# Altium PCB SwitchHub.PcbDoc
Units mm, origin at the board's own origin, x right, y up, seen from the top; angles counter-clockwise.
Board outline 50 x 50 mm, 2 copper layers (Top Layer, Bottom Layer); 42 components, 25 nets, 144 pads, 415 vias.
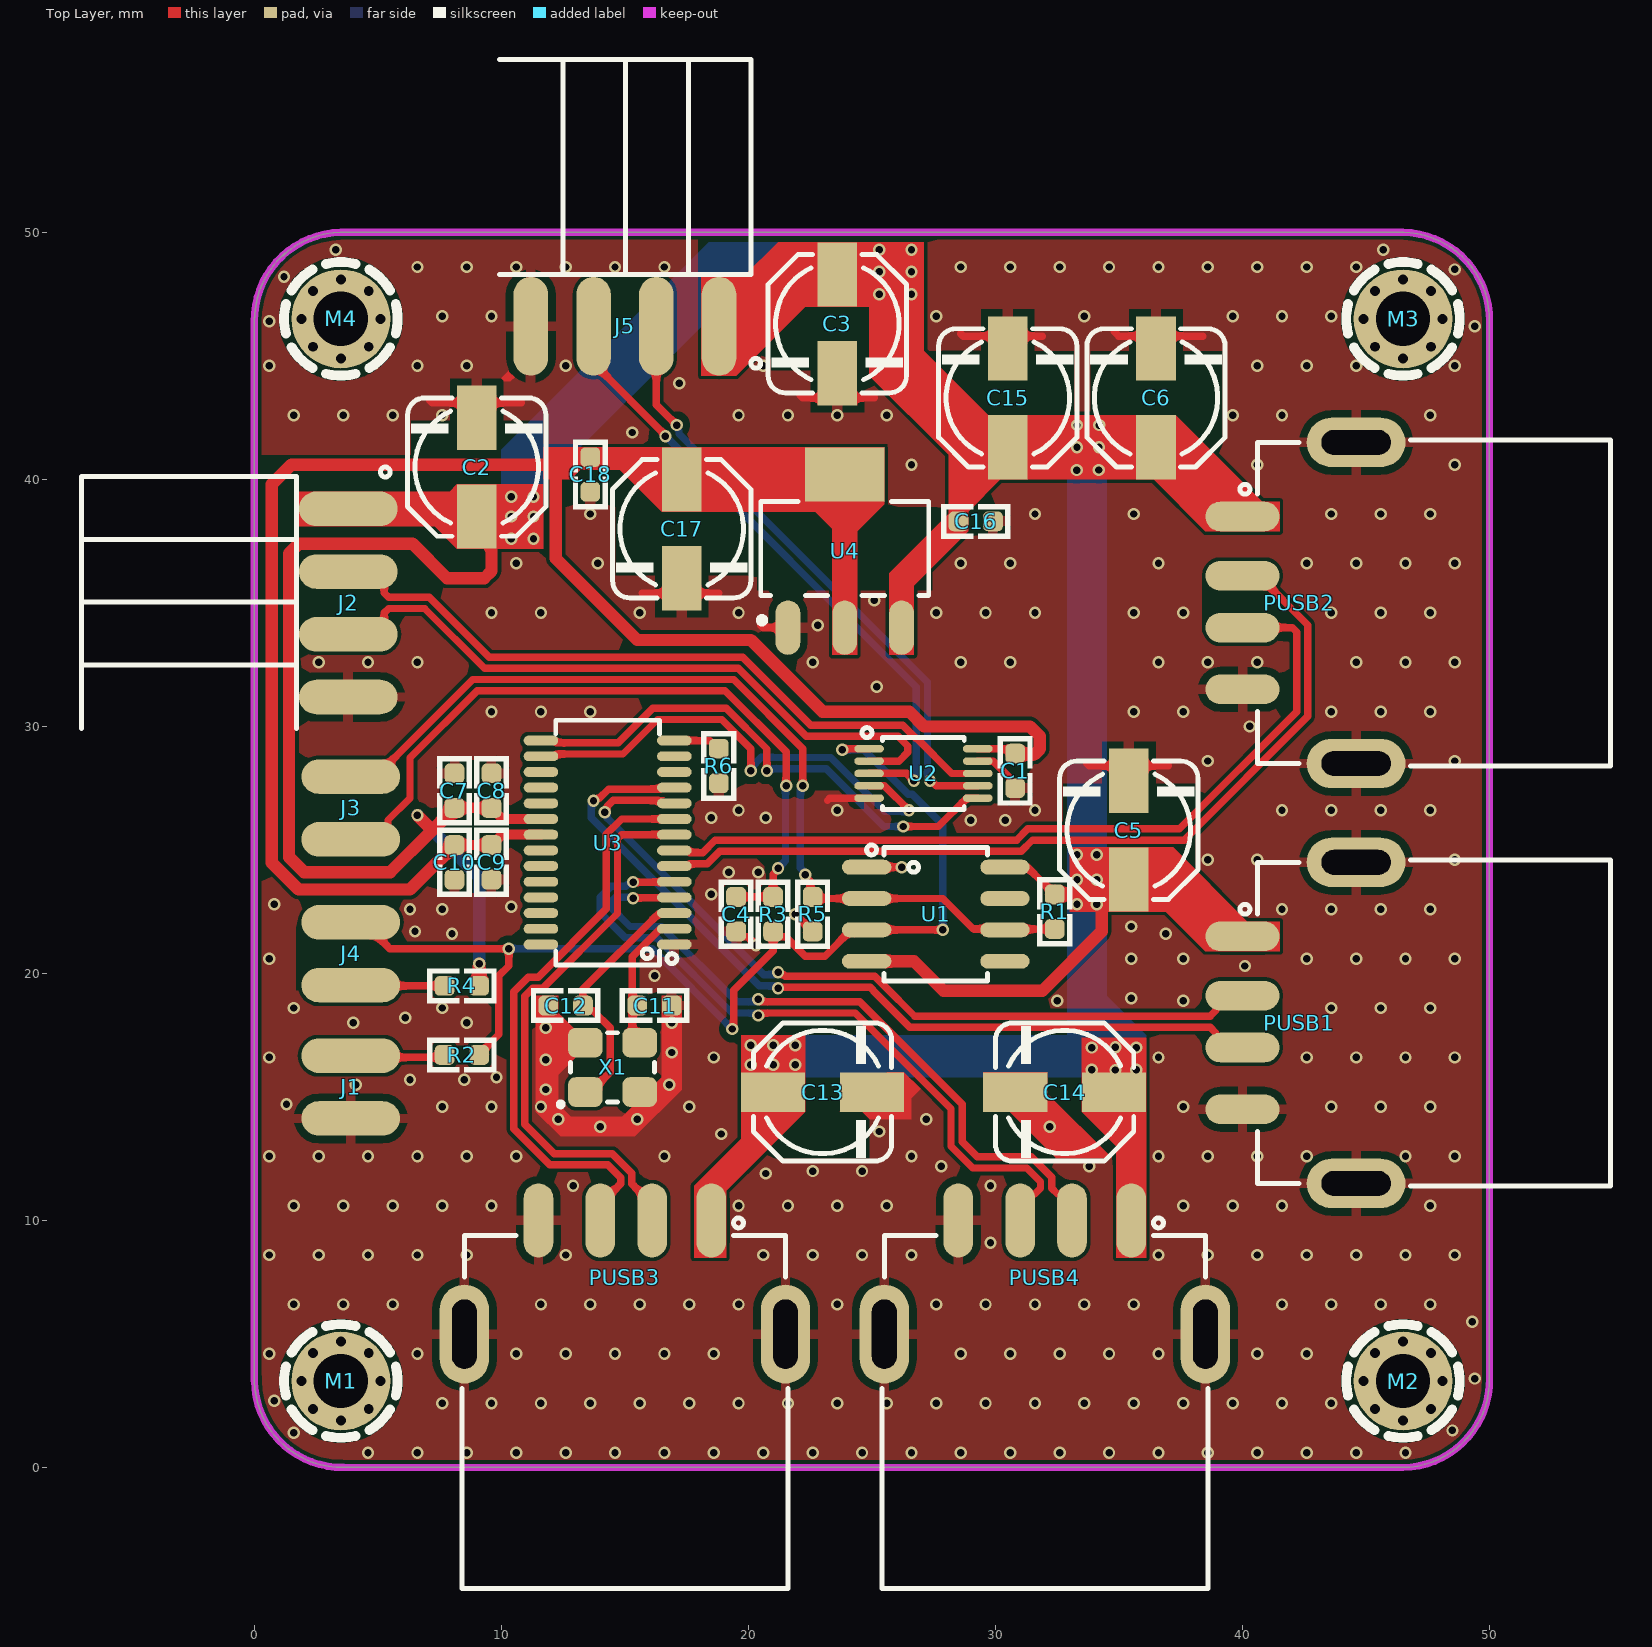
[diagram p0: Top Layer view]
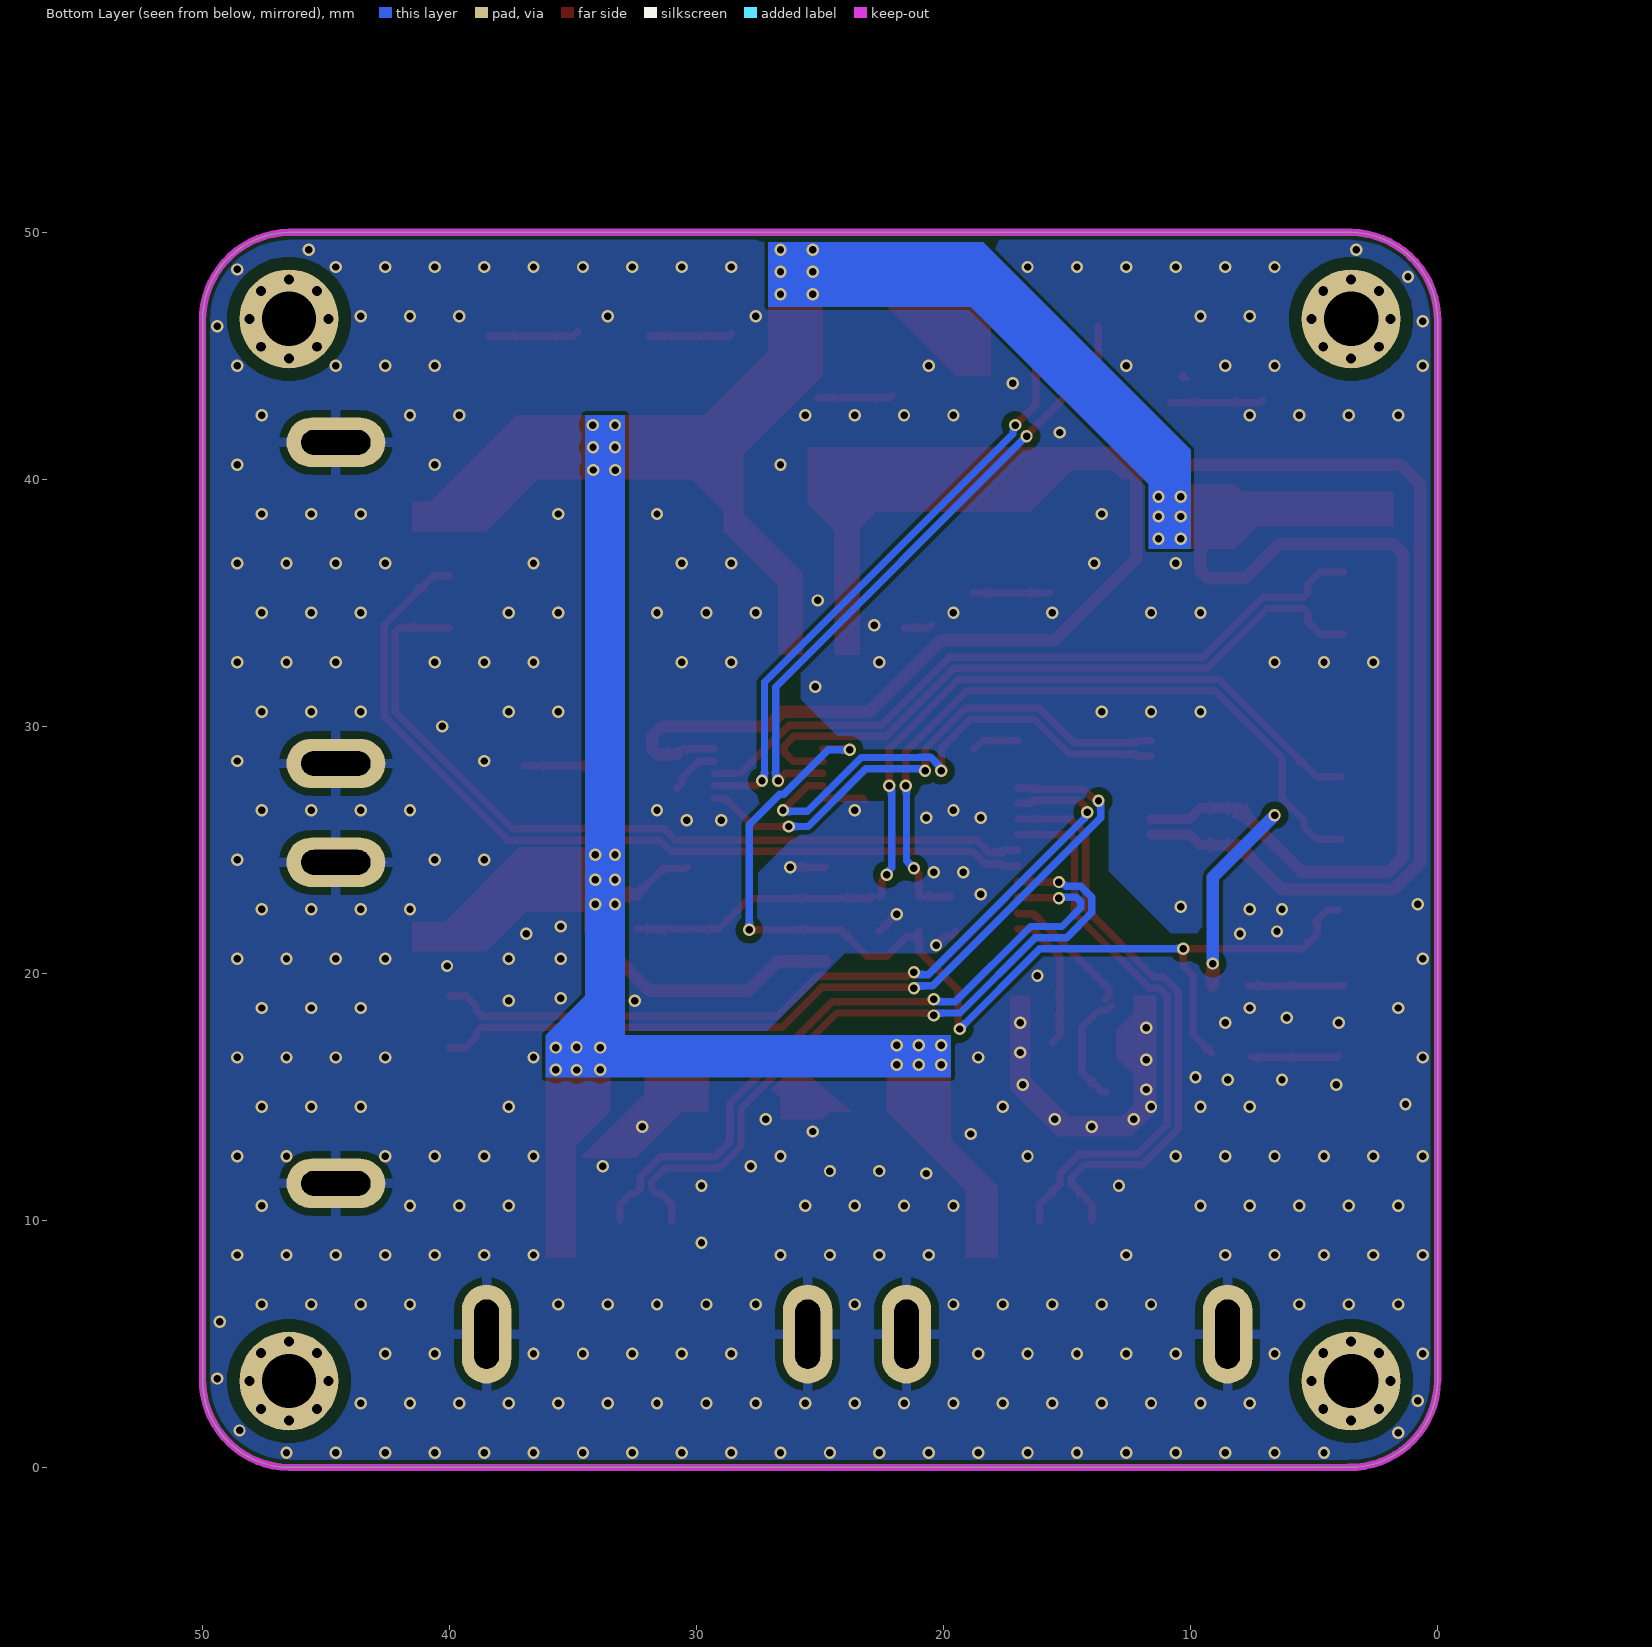
[diagram p1: Bottom Layer view, seen from below]

## Layer stack, top to bottom
Top Solder: solder mask 0.0102, Solder Resist, Dk 3.5
Top Layer: signal copper 0.0356
Dielectric 1: dielectric 0.32, FR-4, Dk 4.8
Bottom Layer: signal copper 0.0356
Bottom Solder: solder mask 0.0102, Solder Resist, Dk 3.5

## Board outline
0.004,3.504 0,46.4 cw(c3.55,46.45) 3.5,50 46.5,50 cw(c46.45,46.45) 50,46.4 50,3.6 cw(c46.45,3.55) 46.5,0 3.604,0 cw(c3.556,3.552)

## Design rules (kind name [scope] priority, off if disabled: settings)
Clearance [All] p1: gap=0.15 ignorepadtopadclearanceinfootprint=FALSE except(0.3: Via-Poly; 0.5: THPad-Poly)
DiffPairsRouting [All] p1: maxlimit=0.254 minlimit=0.15 mostfreqgap=0.15 toplayer_minwidth=0.15 toplayer_maxwidth=10 toplayer_prefwidth=0.15 bottomlayer_minwidth=0.15 bottomlayer_maxwidth=10 bottomlayer_prefwidth=0.15 maxuncoupledlength=12.7
HoleSize [All] p1: absolutevalues=TRUE maxlimit=10 minlimit=0.5 maxpercent=80.000 minpercent=20.000
HoleToHoleClearance [All] p1: gap=0.3 allowstackedmicrovias=TRUE
PlaneClearance [All] p1: clearance=0.3
PlaneConnect [All] p1: planeconnectstyle=Relief reliefexpansion=0.5 reliefentries=4 reliefconductorwidth=0.4 reliefairgap=0.3
PolygonConnect PolygonConnect_Via [All vs IsVia] p1: connectstyle=Direct reliefconductorwidth=0.254 reliefentries=4 polygonreliefangle="90 Angle" airgapwidth=0.254
PolygonConnect PolygonConnect_Pad [All] p2: connectstyle=Relief reliefconductorwidth=0.4 reliefentries=4 polygonreliefangle="90 Angle" airgapwidth=0.3
RoomDefinition USB_Switch [InComponentClass('USB_Switch')] p1: confinementstyle=ConfineIn formatcopy=TRUE lockcomponents=FALSE outline 53.1,1.4 328.899,1.4 328.899,18.4 53.1,18.4
RoutingVias [All] p1: holewidth=0.3 width=0.5 viastyle="Through Hole" minholewidth=0.3 minwidth=0.5 maxholewidth=0.3 maxwidth=0.5
SolderMaskExpansion [All] p1: expansion=0.102 istentingtop=FALSE
Width [All] p1: maxlimit=10 minlimit=0.15 preferedwidth=0.15
25 further rules are at their usual default settings.

## Classes and differential pairs
differential pair USB: +USB_P -USB_N
differential pair USBOUT2: +USBOUT2_P -USBOUT2_N
differential pair USBOUT1: +USBOUT1_P -USBOUT1_N
differential pair USBDN4: +USBDN4_P -USBDN4_N
differential pair USBDN3: +USBDN3_P -USBDN3_N
differential pair USBDN2: +USBDN2_P -USBDN2_N
differential pair USBDN1: +USBDN1_P -USBDN1_N

## Components (designator, comment, footprint, x,y, rotation, side; value= is the part's Value field where it differs from the comment)
C1 "100nF" C0603 30.8,28.2 r270 top
C2 "22uF" C_EL_5 9,40.5 r90 top
C3 "22uF" C_EL_5 23.6,46.3 r270 top
C4 "1uF" C0603 19.5,22.4 r90 top
C5 "22uF" C_EL_5 35.4,25.8 r90 top
C6 "22uF" C_EL_5 36.5,43.3 r90 top
C7 "10uF" C0603 8.1,27.4 r90 top
C8 "100nF" C0603 9.6,27.4 r90 top
C9 "10uF" C0603 9.6,24.5 r270 top
C10 "100nF" C0603 8.1,24.5 r270 top
C11 "22uF" C0603 16.2,18.7 r180 top
C12 "22uF" C0603 12.6,18.7 r0 top
C13 "22uF" C_EL_5 23,15.2 r0 top
C14 "22uF" C_EL_5 32.8,15.2 r180 top
C15 "10uF" C_EL_5 30.5,43.3 r90 top
C16 "100nF" C0603 29.2,38.3 r180 top
C17 "10uF" C_EL_5 17.3,38 r270 top
C18 "100nF" C0603 13.6,40.2 r90 top
J1 "PC1" HDRSE_F_1X2 3.9,15.4 r90 top value=HDRF2
J2 "HDRF4" HDRSE_F_1X4 3.8,35 r90 top
J3 "Button" HDRSE_F_1X2 3.9,26.7 r90 top value=HDRF2
J4 "PC2" HDRSE_F_1X2 3.9,20.8 r90 top value=HDRF2
J5 "HDRF4" HDRSE_F_1X4 15,46.2 r0 top
M1 "DNP/MH" SCMH_M2 3.5,3.5 r0 top
M2 "DNP/MH" SCMH_M2 46.5,3.5 r0 top
M3 "DNP/MH" SCMH_M2 46.5,46.5 r0 top
M4 "DNP/MH" SCMH_M2 3.5,46.5 r0 top
PUSB1 "CONN_USB_A" USB_A_REC_RA_SMD 40,18 r270 top
PUSB2 "CONN_USB_A" USB_A_REC_RA_SMD 40,35 r270 top
PUSB3 "CONN_USB_A" USB_A_REC_RA_SMD 15,10 r180 top
PUSB4 "CONN_USB_A" USB_A_REC_RA_SMD 32,10 r180 top
R1 "10K" R0603 32.4,22.5 r90 top
R2 "330" R0603 8.4,16.7 r0 top
R3 "100K" R0603 21,22.4 r90 top
R4 "330" R0603 8.4,19.5 r0 top
R5 "10K" R0603 22.6,22.4 r90 top
R6 "2.7K" R0603 18.8,28.4 r270 top
U1 "TLC555" SO_8 27.585,22.4 r0 top
U2 "TS3USB30E" VSSOP-10PIN 27.085,28.1 r0 top
U3 "FE1.1S" SOG63_28 14.3,25.3 r180 top
U4 "=Value" SOT223_4 23.9,37.2 r90 top
X1 "8MHz" XTL_4_3225 14.5,16.2 r90 top

## Footprints (in the part's own frame and the unit in brackets; to place one, negate y for a bottom-side part, rotate by r counter-clockwise, add the part's x,y. Pads: shape width x height; smd on the part's side, far side on the other; paste and mask are expansions set on the pad)
C0603 [mm] "CHIP Capacitor, 1.6X0.8mm, 0603 OPTIMIZED"
  rrect50% 0.8x0.8 smd paste-5 mask+0.075: 1(-0.7,0) 2(0.7,0)
  Top Layer pour cut-out: -0.5,0.4 0.5,0.4 0.5,-0.4 -0.5,-0.4
  silkscreen extent -1.4,-0.7 1.4,0.7, body extent -0.8,-0.4 0.8,0.4, height 0.9
C_EL_5 [mm] "Electrolytic Cap, D: 5.0mm, L: 5.8mm, Size C"
  rect 2.6x1.6 smd: 1(-2,0) 2(2,0)
  Top Layer pour cut-out: 1.905,2.667 1.905,-2.7 -1.905,-2.7 -1.905,2.667
  silkscreen extent -2.8,-2.8 2.8,2.8, body extent -3,-2.65 3,2.65
HDRSE_F_1X2 [mm] "Connector; Header; 2 Position, SMD edge"
  oval 1.4x4 smd mask+0.1: 1(1.27,0) 2(-1.27,0)
HDRSE_F_1X4 [mm] "Connector; Header; 4 Position"
  oval 1.4x4 smd mask+0.1: 1(3.81,0) 2(1.27,0) 3(-1.27,0) 4(-3.81,0)
  silkscreen extent -5.08,-1.7 5.5,10.8, body extent -5.08,-0.91 5.08,10.74, height 1.63
R0603 [mm] "CHIP Resistor 1/10 WATT, 1.6x0.8mm, 0603, OPTIMIZED"
  rrect50% 0.8x0.8 smd paste-5 mask+0.075: 1(-0.7,0) 2(0.7,0)
  Top Layer pour cut-out: -0.5,0.4 0.5,0.4 0.5,-0.4 -0.5,-0.4
  silkscreen extent -1.4,-0.7 1.4,0.7, body extent -0.85,-0.4 0.85,0.4, height 0.56
SCMH_M2 [mm] "SCREW mouting, M2, 2.0mm diameter and 4.0mm PanHead"
  round 4 / inner round 2.5 / far side round 4 hole 2.2 mask+0.1: 1(0,0)
  Top Layer pour cut-out: 0,2.5 -0.957,2.31 -1.768,1.768 -2.31,0.957 -2.5,0 -2.5,0 -2.31,-0.957 -1.768,-1.768 -0.957,-2.31 0,-2.5 0,-2.5 1.25,-2.165 2.165,-1.25 2.5,0 2.5,0 2.31,0.957 1.768,1.768 0.957,2.31 0,2.5
  Bottom Layer pour cut-out: 0,2.5 -0.957,2.31 -1.768,1.768 -2.31,0.957 -2.5,0 -2.5,0 -2.31,-0.957 -1.768,-1.768 -0.957,-2.31 0,-2.5 0,-2.5 1.25,-2.165 2.165,-1.25 2.5,0 2.5,0 2.31,0.957 1.768,1.768 0.957,2.31 0,2.5
  silkscreen extent -2.3,-2.3 2.3,2.3
SO_8 [mm] "SOP-8, 5x3.9mm body 1.27mm pitch, SOT96-1, M08A, S8, SOIC8, VO8, MS-012AA(JEDEC), R-8, 8S2, VOG8"
  oval 2x0.6 smd: 1(-2.8,1.905) 2(-2.8,0.635) 3(-2.8,-0.635) 4(-2.8,-1.905) 5(2.8,-1.905) 6(2.8,-0.635) 7(2.8,0.635) 8(2.8,1.905)
  silkscreen extent -2.8,-2.7 2.1,2.8, body extent -3,-2.45 3,2.45, height 1.7
SOG63_28 [mm] "SSOP, 28-Leads, 9.9x3.9mm, Pitch 0.635mm"
  oval 1.4x0.4 smd: 1(-2.7,4.127) 2(-2.7,3.492) 3(-2.7,2.857) 4(-2.7,2.222) 5(-2.7,1.587) 6(-2.7,0.952) 7(-2.7,0.317) 8(-2.7,-0.318) 9(-2.7,-0.953) 10(-2.7,-1.588) 11(-2.7,-2.223) 12(-2.7,-2.858) 13(-2.7,-3.492) 14(-2.7,-4.127) 15(2.7,-4.127) 16(2.7,-3.492) 17(2.7,-2.857) 18(2.7,-2.222) 19(2.7,-1.587) 20(2.7,-0.952) 21(2.7,-0.317) 22(2.7,0.318) 23(2.7,0.953) 24(2.7,1.588) 25(2.7,2.223) 26(2.7,2.858) 27(2.7,3.492) 28(2.7,4.127)
  silkscreen extent -2.8,-4.95 2.1,4.95, body extent -3,-4.95 3,4.95, height 1.75
SOT223_4 [mm] "SOT223, 4-Leads, Body 6.5x3.5mm, Pitch 2.30mm"
  oval 2.2x1 smd: 1(-3.2,2.3) 2(-3.2,0) 3(-3.2,-2.3)
  rect 2.2x3.2 smd paste-5: 4(3,0)
  Top Layer pour cut-out: -1.7,3.556 1.7,3.556 1.7,-3.556 -1.7,-3.556
  silkscreen extent -3.02,-3.4 1.9,3.47, body extent -3.5,-3.25 3.5,3.25, height 1.7
USB_A_REC_RA_SMD [mm] "CONN, USB A, Receptacle, RIGHT ANGLE, SMD"
  oval 1.2x3 smd: 1(-3.5,0) 2(-1.1,0) 3(1,0) 4(3.5,0)
  oval 2x4 hole 1 slot 2.8 at 90 deg: SH1(-6.5,4.6) SH2(6.5,4.6)
  silkscreen extent -6.6,-0.1 6.6,14.9, body extent -7.3,-0.21 7.2,14.81, height 7.7
VSSOP-10PIN [mm]
  oval 1.2x0.3 smd mask+0.075: 1(-2.2,0.996) 2(-2.2,0.496) 3(-2.2,-0.004) 4(-2.2,-0.504) 5(-2.2,-1.004) 6(2.2,-1.004) 7(2.2,-0.504) 8(2.2,-0.004) 9(2.2,0.496) 10(2.2,0.996)
  silkscreen extent -2.49,-1.45 1.65,1.85, body extent -2.45,-1.5 2.45,1.5, height 1.1
XTL_4_3225 [mm] "CRYSTAL OSCILATOR 3.2X2.5mm, ABM8, CDFN-4"
  rrect50% 1.2x1.4 smd: 1(-1,1.1) 2(-1,-1.1) 3(1,-1.1) 4(1,1.1)
  Top Layer pour cut-out: -1.6,1.8 -1.6,-1.8 1.6,-1.8 1.6,1.8
  silkscreen extent -1.6,-1.7 1.4,2.2, body extent -1.25,-1.6 1.25,1.6, height 0.61

## Part data
C1 C4 C7 C8 C9 C10 C11 C12 C16 C18: library part CAP_SMD_MLCC_0805, "CAP, MLCC, -F, -V, MATERIAL, -%, 0201", ASSEMBLY=ASSEMBLY, MANF=-, MANF_P#=MANF_PART#, PARAM="-, -%", PARAM2=-V, PRICE="100= 1$"
C2 C3 C5 C6 C13 C14 C15 C17: library part CAP_SMD_EL, "CAP, THD, ELEC,", ASSEMBLY=ASSEMBLY, DESC=DESCRIPTION, DIST#=MOUSER, MANF=MANF, MANF_P#=MANF_PART#, PARAM=20%, PARAM2=-V, PRICE="10= -$"
J1 J3 J4: library part HDRSE_F_1X2, "CONN, HEADER, Female, pitch: 2.54mm, 2POS"
J2 J5: library part HDRSE_F_1X4, "CONN, HEADER, Female, pitch: 2.54mm, 4POS"
M1 M2 M3 M4: library part SCMH_M2, "SCREW mouting, M2, 2.0mm diameter and 4.0mm PanHead", ASSEMBLY=DNP
PUSB1 PUSB2 PUSB3 PUSB4: library part CONN_USB_A_REC_RA_SMD, "CONN, USB, A, RECEPTACLE, R/A, SMD"
R1 R2 R3 R4 R5 R6: library part RES_SMD_0805, "RESISTOR, SMD", ASSEMBLY=ASSEMBLY, DESC=DESCRIPTION, DIST#=MOUSER, MANF=-, MANF_P#=-, PARAM=-W, PARAM2=1%, PRICE="100= 0.5$"
U1: library part TLC555I_SOP8, "555 Timer, CMOS", MANF="Texas Instruments", MANF_P#=TLC555ID, PARAM="100mA sink, 10mA source, 180µA", PARAM2="2~15V, 2100kHz, -40~85oC"
U2: "High-Speed USB 2.0 (480-Mbps) / 1:2 Multiplexer/Demultiplexer Switch With Single Enable", MANF="TEXAS INSTRUMENT"
U3: "USB 2.0 HIGH SPEED 4-PORT HUB CONTROLLER"
U4: library part AMS1117-3.3, "1A Adjustable/Fixed Low Dropout Linear Regulator"
X1: library part XTL_4_8MHz_3225, "Crystal 8MHz", MANF=ECS, MANF_P#=ECS-80-18-33-JGN-TR, PARAM="30PPM, 20pF", PRICE=0.5$

## Via types
v1: diameter 0.5, hole 0.3, Top Layer to Bottom Layer, tented both sides, 277 vias
v2: diameter 0.5/0.5 (per signal layer), hole 0.3, Top Layer to Bottom Layer, tented both sides, 106 vias
v3: diameter 0.6, hole 0.4, Top Layer to Bottom Layer, 32 vias

## Nets (pads, with @x,y where several pads share a name; then routed paths per layer and width w, separated by ;. In a path a pad name is that pad's centre, name@x,y a point inside that pad or via, vN(x,y) a via of type N, cw(c..) or ccw(c..) an arc to the next point about the centre after c; other vN are vias at no path point)
Button: J4.1 R2.2 R3.1 U1.3 U2.1 | length 45.4
  Top Layer w0.3: J4.1@4,22.57 4.466,22.57 J4.1@4.974,22.062 ; J4.1@4.874,22.062 4.874,21.596 5.47,21 v1(10.3,21) 10.3,20.3 9.9,19.9 9.9,17.527 R2.2@9.149,16.776 ; v2(19.35,17.75) 19.388,17.788 19.388,17.93 19.4,17.941 19.4,19.319 21,20.919 21,21.673 R3.1 21.21,21.49 21.51,21.49 22.3,20.7 23.1,20.7 24.165,21.765 U1.3 v1(27.865,21.765) ; v1(23.8,29.05) 23.854,29.05 23.9,29.096 U2.1
  Bottom Layer w0.3: v1(10.3,21) 16.1,21 v2(19.35,17.75) ; v1(23.8,29.05) 24.672,29.05 26.472,27.25 26.628,27.25 27.865,26.013 v1(27.865,21.765)
GND: C1.2 C2.2 C3.2 C4.1 C5.2 C6.2 C7.2 C8.2 C9.2 C10.2 C11.1 C12.1 C13.2 C14.2 C15.2 C16.1 C17.2 C18.1 J1.2 J2.4 J5.4 PUSB1.4 PUSB1.SH1 PUSB1.SH2 PUSB2.4 PUSB2.SH1 PUSB2.SH2 PUSB3.4 PUSB3.SH1 PUSB3.SH2 PUSB4.4 PUSB4.SH1 PUSB4.SH2 R5.1 R6.2 U1.1 U2.5 U2.9 U3.1 U4.1 X1.2 X1.4 | length 28.6
  Top Layer w0.3: 7.1,43.2 7.2,43.1 10.8,43.1 ; 15.7,35.4 18.8,35.4 ; C4.1 19.719,21.481 19.967,21.481 v2(20.304,21.143) ; 20.5,34.1 20.6,34 U4.1 ; v1(21.9,22.4) R5.1 ; 22.1,43.4 22.2,43.3 25.1,43.3 ; 23.2,27 23.296,27.096 U2.5 ; U1.1 26.195,24.305 v1(26.2,24.3) ; 28.6,45.9 28.7,45.8 31.9,45.8 ; U2.9 29.907,28.596 30.581,27.923 30.581,27.719 C1.2 ; 33.7,28.5 33.8,28.4 37,28.4 ; 34.8,46 35,45.8 38.4,45.8
  other v1: 4.6,0.6 6.6,0.6 8.6,0.6 10.6,0.6 12.6,0.6 14.6,0.6 16.6,0.6 18.6,0.6 20.6,0.6 22.6,0.6 24.6,0.6 26.6,0.6 28.6,0.6 30.6,0.6 32.6,0.6 34.6,0.6 36.6,0.6 38.6,0.6 40.6,0.6 42.6,0.6 44.6,0.6 46.6,0.6 7.6,2.6 9.6,2.6 11.6,2.6 13.6,2.6 15.6,2.6 17.6,2.6 19.6,2.6 21.6,2.6 23.6,2.6 25.6,2.6 27.6,2.6 29.6,2.6 31.6,2.6 33.6,2.6 35.6,2.6 37.6,2.6 39.6,2.6 41.6,2.6 43.6,2.6 0.6,4.6 6.6,4.6 10.6,4.6 12.6,4.6 14.6,4.6 16.6,4.6 18.6,4.6 28.6,4.6 30.6,4.6 32.6,4.6 34.6,4.6 36.6,4.6 40.6,4.6 42.6,4.6 1.6,6.6 3.6,6.6 5.6,6.6 11.6,6.6 13.6,6.6 15.6,6.6 17.6,6.6 19.6,6.6 23.6,6.6 27.6,6.6 29.6,6.6 31.6,6.6 33.6,6.6 35.6,6.6 41.6,6.6 43.6,6.6 45.6,6.6 47.6,6.6 0.6,8.6 2.6,8.6 4.6,8.6 6.6,8.6 8.6,8.6 12.6,8.6 20.6,8.6 22.6,8.6 24.6,8.6 26.6,8.6 36.6,8.6 38.6,8.6 40.6,8.6 42.6,8.6 44.6,8.6 46.6,8.6 48.6,8.6 1.6,10.6 3.6,10.6 5.6,10.6 7.6,10.6 9.6,10.6 19.6,10.6 21.6,10.6 23.6,10.6 25.6,10.6 37.6,10.6 39.6,10.6 41.6,10.6 47.6,10.6 0.6,12.6 2.6,12.6 4.6,12.6 6.6,12.6 8.6,12.6 10.6,12.6 16.6,12.6 26.6,12.6 36.6,12.6 38.6,12.6 40.6,12.6 42.6,12.6 46.6,12.6 48.6,12.6 7.6,14.6 9.6,14.6 11.6,14.6 17.6,14.6 37.6,14.6 43.6,14.6 45.6,14.6 47.6,14.6 0.6,16.6 18.6,16.6 36.6,16.6 42.6,16.6 44.6,16.6 46.6,16.6 48.6,16.6 1.6,18.6 7.6,18.6 43.6,18.6 45.6,18.6 47.6,18.6 0.6,20.6 42.6,20.6 44.6,20.6 46.6,20.6 48.6,20.6 7.6,22.6 41.6,22.6 43.6,22.6 45.6,22.6 47.6,22.6 38.6,24.6 40.6,24.6 48.6,24.6 19.6,26.6 23.6,26.6 31.6,26.6 41.6,26.6 43.6,26.6 45.6,26.6 47.6,26.6 38.6,28.6 48.6,28.6 9.6,30.6 11.6,30.6 13.6,30.6 35.6,30.6 37.6,30.6 43.6,30.6 45.6,30.6 47.6,30.6 2.6,32.6 4.6,32.6 6.6,32.6 22.6,32.6 28.6,32.6 30.6,32.6 36.6,32.6 38.6,32.6 40.6,32.6 44.6,32.6 46.6,32.6 48.6,32.6 9.6,34.6 11.6,34.6 15.6,34.6 19.6,34.6 27.6,34.6 29.6,34.6 31.6,34.6 35.6,34.6 37.6,34.6 43.6,34.6 45.6,34.6 47.6,34.6 10.6,36.6 28.6,36.6 30.6,36.6 36.6,36.6 42.6,36.6 44.6,36.6 46.6,36.6 48.6,36.6 13.6,38.6 31.6,38.6 35.6,38.6 43.6,38.6 45.6,38.6 47.6,38.6 26.6,40.6 40.6,40.6 48.6,40.6 1.6,42.6 3.6,42.6 5.6,42.6 7.6,42.6 19.6,42.6 21.6,42.6 23.6,42.6 25.6,42.6 39.6,42.6 41.6,42.6 47.6,42.6 0.6,44.6 6.6,44.6 8.6,44.6 12.6,44.6 20.6,44.6 40.6,44.6 42.6,44.6 44.6,44.6 48.6,44.6 7.6,46.6 9.6,46.6 27.6,46.6 33.6,46.6 39.6,46.6 41.6,46.6 43.6,46.6 6.6,48.6 8.6,48.6 10.6,48.6 12.6,48.6 14.6,48.6 16.6,48.6 28.6,48.6 30.6,48.6 32.6,48.6 34.6,48.6 36.6,48.6 38.6,48.6 40.6,48.6 42.6,48.6 44.6,48.6
  other v2: 1.6,1.4 48.5,1.5 0.8,2.7 49.4,3.6 49.3,5.9 29.8,9.1 12.9,11.4 29.8,11.4 20.7,11.9 22.6,12 24.6,12 27.8,12.2 33.8,12.2 18.9,13.5 25.3,13.6 14,13.8 32.2,13.8 12.3,14.1 15.5,14.1 27.2,14.1 1.3,14.7 11.8,15.3 4.1,15.5 16.8,15.5 6.3,15.7 8.5,15.7 9.8,15.8 11.8,16.5 16.9,16.8 11.8,17.8 4,18 8.6,18 16.9,18 6.1,18.2 32.5,18.9 37.6,18.9 35.5,19 16.2,19.9 40.1,20.3 35.5,20.6 37.6,20.6 8,21.6 36.9,21.6 6.5,21.7 35.5,21.9 6.3,22.6 10.4,22.7 0.8,22.8 18.5,23.2 19.2,24.1 20.4,24.1 29,26.2 30.4,26.2 18.5,26.3 20.7,26.3 40.3,30 25.2,31.6 22.8,34.1 25.1,35.1 13.9,36.6 15.3,41.9 17.2,43.9 49.4,46.2 0.6,46.4 1.2,48.2 48.6,48.5 3.3,49.3 45.7,49.3
NetC4_2: C4.2 J3.2 R3.2 | length 29.7
  Top Layer w0.3: J3.2 4.902,25.43 5.41,25.938 5.41,26.21 6.3,27.1 6.3,28.731 9.019,31.45 19.05,31.45 21.524,28.976 v1(21.524,27.603) ; C4.2@19.7,23.1 R3.2 21,24.008 21.2,24.208 v1(21.2,24.262)
  Bottom Layer w0.3: v1(21.2,24.262) 21.5,24.562 21.5,27.578 v1(21.524,27.603)
NetC11_2: C11.2 U3.2 X1.3 | length 5.8
  Top Layer w0.3: X1.3 15.3,17.5 15.3,18.7 15.3,20.68 16.409,21.788 16.981,21.788 U3.2
NetC12_2: C12.2 U3.3 X1.1 | length 10.2
  Top Layer w0.3: C12.2@13.2,18.7 13.41,18.49 13.71,18.49 14.4,17.8 14.4,16 14.05,15.65 14.031,15.65 13.581,15.2 X1.1 ; C12.2@13.45,18.95 13.293,19.107 13.293,19.355 16.361,22.423 16.981,22.423 U3.3
NetJ1_1: J1.1 R2.1 | length 3.6
  Top Layer w0.3: J1.1@4,16.67 4.07,16.6 R2.1@7.535,16.6
NetJ3_1: J3.1 R1.1 R5.2 U1.2 U1.6 | length 37.4
  Top Layer w0.3: J3.1 4.902,27.97 8.832,31.9 19.4,31.9 22.2,29.1 v1(22.2,27.6) ; v1(22.3,24) 22.3,23.946 22.505,23.741 22.505,23.195 R5.2 ; R5.2@22.9,23.1 22.965,23.035 U1.2 27.865,23.035 29.1,21.8 30.35,21.8 U1.6 30.42,21.8 R1.1
  Bottom Layer w0.3: v1(22.2,27.6) 22.2,27.546 22.1,27.446 22.1,24.276 22.2,24.176 22.2,24.154 22.3,24.054 v1(22.3,24)
NetJ4_2: J4.2 R4.1 | length 3.9
  Top Layer w0.3: J4.2@3.8,19.53 3.83,19.5 R4.1@7.666,19.5
NetR6_1: R6.1 U3.14 | length 1.9
  Top Layer w0.3: U3.14 18.445,29.428 18.773,29.1 R6.1
USB_N: U2.6 U3.15 | length 21.4
  Top Layer w0.3: U3.15 12.127,29.428 12.22,29.335 14.735,29.335 16.132,30.732 19.105,30.732 20.75,29.086 v1(20.75,28.2) ; v1(26.272,25.95) 27.689,25.95 28.835,27.096 U2.6
  Bottom Layer w0.3: v1(20.75,28.2) 20.788,28.238 20.93,28.238 20.983,28.291 23.144,28.291 25.486,25.95 v1(26.272,25.95)
USB_P: U2.4 U3.16 | length 20.2
  Top Layer w0.3: U3.16 12.127,28.793 12.22,28.885 14.921,28.885 16.318,30.282 18.918,30.282 20.1,29.1 v1(20.1,28.2) ; U2.4 25.504,27.596 v1(26.5,26.6)
  Bottom Layer w0.3: v1(20.1,28.2) 20.1,28.254 20.2,28.354 20.2,28.428 20.522,28.75 20.978,28.75 20.986,28.741 23.331,28.741 25.51,26.562 26.462,26.562 v1(26.5,26.6)
USBDN1_N: PUSB1.2 U3.10 | length 33
  Top Layer w0.3: v1(14.186,26.532) 14.186,26.586 14.286,26.686 14.286,26.774 14.522,27.009 15.411,27.009 ; 15.411,27.009 16.352,27.009 16.473,26.888 U3.10 ; v1(21.2,20.05) 21.254,20.05 21.354,19.95 21.428,19.95 21.494,19.884 25.116,19.884 25.5,19.5 26.725,18.275 38.689,18.275 38.928,18.514 38.928,18.684 39.344,19.1 PUSB1.2
  Bottom Layer w0.3: v1(14.186,26.532) 14.186,26.478 14.286,26.378 14.286,26.291 20.627,19.95 21.046,19.95 21.146,20.05 v1(21.2,20.05)
USBDN1_P: PUSB1.3 U3.11 | length 34.6
  Top Layer w0.3: v1(13.727,26.992) 13.781,26.992 13.881,27.092 13.968,27.092 14.335,27.459 15.597,27.459 16.409,27.459 16.473,27.523 U3.11 ; v1(21.2,19.4) 21.234,19.434 24.929,19.434 25.182,19.182 26.539,17.825 38.689,17.825 38.928,17.586 38.928,17.416 39.344,17 PUSB1.3
  Bottom Layer w0.3: v1(13.727,26.992) 13.689,26.954 13.689,26.812 13.636,26.76 13.636,26.305 13.959,25.982 20.441,19.5 21.046,19.5 21.146,19.4 v1(21.2,19.4)
USBDN2_N: PUSB3.2 U3.8 | length 23.1
  Top Layer w0.3: PUSB3.2 16.1,10.656 15.275,11.481 15.275,11.916 14.491,12.7 12.143,12.7 10.95,13.893 10.95,19.074 11.276,19.4 11.671,19.4 14.7,22.429 14.7,25.442 14.876,25.618 15.771,25.618 U3.8
USBDN2_P: PUSB3.3 U3.9 | length 23.9
  Top Layer w0.3: PUSB3.3 14,10.656 14.825,11.481 14.825,11.73 14.305,12.25 11.957,12.25 10.5,13.707 10.5,19.261 11.089,19.85 11.485,19.85 14.25,22.615 14.25,25.628 14.874,26.252 15.676,26.252 U3.9
USBDN3_N: PUSB2.2 U3.6 | length 35.3
  Top Layer w0.3: U3.6 17.527,24.348 17.62,24.44 18.336,24.44 18.846,24.95 31.05,24.95 31.5,25.4 37.636,25.4 42.65,30.414 42.65,34.106 40.656,36.1 PUSB2.2
USBDN3_P: PUSB2.3 U3.7 | length 33.1
  Top Layer w0.3: U3.7 17.527,24.983 17.62,24.89 18.15,24.89 18.66,25.4 30.864,25.4 31.314,25.85 37.45,25.85 42.2,30.6 42.2,33.824 42.024,34 PUSB2.3
USBDN4_N: PUSB4.2 U3.4 | length 28.4
  Top Layer w0.3: v1(15.33,23.05) 15.337,23.058 16.293,23.058 ; 16.294,23.058 16.981,23.058 U3.4 ; v1(20.4,18.95) 20.5,18.85 24.511,18.85 28.65,14.711 28.65,13.193 29.269,12.574 31.447,12.574 32.275,11.746 32.275,11.311 32.514,11.072 32.684,11.072 33.1,10.656 PUSB4.2
  Bottom Layer w0.3: v1(15.33,23.05) 15.302,23.078 14.63,23.078 14.454,22.902 14.454,22.653 15.207,21.9 16.473,21.9 19.523,18.85 20.246,18.85 20.346,18.95 v1(20.4,18.95)
USBDN4_P: PUSB4.3 U3.5 | length 29.2
  Top Layer w0.3: v1(15.33,23.7) 15.471,23.7 15.479,23.693 16.03,23.693 ; 16.031,23.693 16.454,23.693 16.473,23.713 U3.5 ; v1(20.4,18.3) 20.5,18.4 24.324,18.4 28.2,14.524 28.2,13.007 29.083,12.124 31.261,12.124 31.825,11.56 31.825,11.311 31.586,11.072 31.416,11.072 31,10.656 PUSB4.3
  Bottom Layer w0.3: v1(15.33,23.7) 15.276,23.7 15.176,23.6 15.102,23.6 15.029,23.528 14.443,23.528 14.004,23.088 14.004,22.467 15.021,21.45 16.286,21.45 19.336,18.4 20.246,18.4 20.346,18.3 v1(20.4,18.3)
USBOUT1_N: J2.2 U2.8 | length 29.1
  Top Layer w0.3: J2.2 4.749,36.27 5.257,35.762 5.257,35.401 5.433,35.225 7.075,35.225 7.339,34.961 9.5,32.8 19.773,32.8 22.523,30.05 26.25,30.05 26.776,29.524 26.807,29.524 28.235,28.096 U2.8
USBOUT1_P: J2.3 U2.2 | length 27.6
  Top Layer w0.3: J2.3 4.749,33.73 5.257,34.238 5.257,34.599 5.433,34.775 6.889,34.775 9.314,32.35 19.586,32.35 22.336,29.6 26.064,29.6 26.458,29.206 26.458,28.958 26.096,28.596 U2.2
USBOUT2_N: J5.2 U2.7 | length 25
  Top Layer w0.3: J5.2 16.27,43.03 v1(17.1,42.2) ; v1(27.35,27.8) 27.404,27.8 27.608,27.596 U2.7
  Bottom Layer w0.3: v1(17.1,42.2) 17.138,42.162 17.138,42.02 17.19,41.968 17.19,41.841 27.25,31.782 27.25,27.954 27.35,27.854 v1(27.35,27.8)
USBOUT2_P: J5.3 U2.3 | length 25.8
  Top Layer w0.3: J5.3 13.73,44.705 16.64,41.794 v1(16.64,41.74) ; U2.3 26.404,28.096 v1(26.7,27.8)
  Bottom Layer w0.3: v1(16.64,41.74) 16.655,41.74 26.8,31.595 26.8,27.954 26.7,27.854 v1(26.7,27.8)
VCC3V3: C1.1 C9.1 C10.1 C17.1 C18.2 U2.10 U3.21 U4.2 U4.4 | length 69
  Top Layer w0.3: C9.1 C9.1@9.608,25.2 ; U2.10 30.604,29.096 C1.1
  Top Layer w0.4: C10.1 C9.1 ; C9.1@9.608,25.2 10.026,25.618 U3.21
  Top Layer w0.5: C10.1 6.3,23.4 1.788,23.4 0.7,24.488 0.7,39.8 1.5,40.6 12.2,40.6 12.2,36.8 15.5,33.5 20.1,33.5 23,30.6 26.509,30.6 27.109,30 31.4,30 31.8,29.6 31.8,29.093 31.575,28.868 30.832,28.868 C1.1
VCC5V: C2.1 C3.1 C5.1 C6.1 C7.1 C8.1 C13.1 C14.1 C15.1 C16.2 J2.1 J5.1 PUSB1.1 PUSB2.1 PUSB3.1 PUSB4.1 R1.2 R4.2 U1.4 U1.8 U3.20 U4.3 | length 67.4
  Top Layer w0.3: U1.8 30.442,24.248 31.352,24.248 R1.2
  Top Layer w0.4: C7.1 C8.1 10.048,26.253 U3.20
  Top Layer w0.5: v1(6.6,26.4) 7.15,25.85 7.15,25.75 ; C7.1 7.95,26.55 7.15,25.75 ; C2.1 9.55,37.95 9.55,37.207 9.6,37.157 9.6,36.293 9.307,36 7.8,36 6.4,37.4 1.8,37.4 1.4,37 1.4,24.707 2.007,24.1 5.5,24.1 7.15,25.75 ; R4.2 v1(9.1,20.4) ; U1.4 26.705,20.495 27.9,19.3 31.9,19.3 34.3,21.7 34.3,23.3 ; R1.2 34,23.2 34.1,23.3 34.3,23.3 ; 34.4,23.4 34.3,23.3
  Bottom Layer w0.5: v1(6.6,26.4) 9.1,23.9 v1(9.1,20.4) ; v2(33.9,17) 34.1,17.2 v2(34.1,22.8)
  other v2: 33.9,16.1 34.858,16.091 35.7,16.1 20.1,16.3 21,16.3 21.9,16.3 35.7,17 34.858,17.006 20.1,17.1 21,17.1 21.9,17.1 33.3,22.8 33.3,23.8 34.1,23.8 33.3,24.8 34.1,24.8 10.4,37.6 11.3,37.6 10.4,38.5 11.3,38.5 10.4,39.3 11.3,39.3 33.288,40.378 34.188,40.382 33.3,41.3 34.191,41.3 33.3,42.2 34.2,42.2 25.3,47.5 26.6,47.5 25.3,48.4 26.6,48.4 25.3,49.3 26.6,49.3
pads on no net: M1.1 M2.1 M3.1 M4.1 U1.5 U1.7 U3.12 U3.13 U3.17 U3.18 U3.19 U3.22 U3.23 U3.24 U3.25 U3.26 U3.27 U3.28
copper on no net:
  other v3: 3.5,1.9 46.5,1.9 2.369,2.369 4.631,2.369 45.369,2.369 47.631,2.369 1.9,3.5 5.1,3.5 44.9,3.5 48.1,3.5 2.369,4.631 4.631,4.631 45.369,4.631 47.631,4.631 3.5,5.1 46.5,5.1 3.5,44.9 46.5,44.9 2.369,45.369 4.631,45.369 45.369,45.369 47.631,45.369 1.9,46.5 5.1,46.5 44.9,46.5 48.1,46.5 2.369,47.631 4.631,47.631 45.369,47.631 47.631,47.631 3.5,48.1 46.5,48.1

## Polygon pours and split planes (outlines as drawn)
GND on Top Layer "NONET_L-01_P-001" (solid, pour order 0): 49.9,50 0,50 -0.1,49.9 -0.1,-0.1 49.6,-0.1 50,0.3
GND on Bottom Layer "NONET_L-01_P-001" (solid, pour order 1): 50,50 0.2,50 -0.3,49.5 -0.3,-0.2 50.1,-0.2

## Keep-outs
Keep-Out Layer:
  the board outline again, w0.3

## Other copper
Top Layer:
  region net VCC3V3: 22.3,41.3 13.2,41.3 11.7,41.3 11.7,40 12.8,40 13.2,40.4 14.8,40.4 16.5,38.7 23.1,38.7
  region net VCC3V3: 24.4,32.9 24.4,37.9 25.5,39 25.5,41.3 22.3,41.3 22.3,39.1 23.4,38 23.4,32.9
  pour cut-out: 16.1,8.344 14,8.344 14.1,8.444 14.1,11.3 15.456,11.3 15.688,11.069
  pour cut-out: 33.1,8.344 31,8.344 31,10.656 31.416,11.072 32.684,11.072
  pour cut-out: 1.672,21.848 1.672,19.308 4.908,19.308 5.6,20 5.6,21.4
  pour cut-out: 2.2,41 -0.1,41 -0.1,40.9 1,39.8
  region net GND: 10.3,44.4 10.3,44.362 10.532,44.13 10.366,43.965 10.1,43.965 10.1,43.989 9.989,44.1
  pour cut-out: 16.27,48.357 13.73,48.357 13.73,46.77 14.2,46.3 14.2,44.2 14.4,44.2 15.9,42.7 16.23,43.03 16.27,43.03
  pour cut-out: 17.948,47.685 17.948,50.248 18.1,50.4 18.6,49.9 21.2,49.9 21.2,48.8 21.1,48.7
  pour cut-out: 28.2,45.2 27.1,45.2 27.6,44.7 28.1,44.7
  pour cut-out: 38.344,36.1 38.344,33.83 38.374,33.8 40.8,33.8 40.8,33.9 41.5,34.6 41.2,34.9 41.2,35.6
  pour cut-out: 41.656,19.1 41.631,19.074 41.631,16.804 39.104,16.804 38.7,17.2 38.7,18.9
  pour cut-out: 24.6,27.4 22.1,27.4 22.1,29.2 21.8,29.5 23.9,29.5
  pour cut-out: 0.7,36.9 0.7,39.8 1.5,40.6 6.85,40.6 6.85,38.55 7.3,38.1
  region net GND: 23.7,14.4 24.605,14.4 24.905,14.1 26.6,14.1 26.6,14.953 26.97,15.322 26.292,16 25.6,16
  region net GND: 29.5,14.4 30.577,14.4 32.444,12.533 34.705,12.533 32.1,15.138 32.1,16 29.5,16
  pour cut-out: 31.4,18.2 30.8,17.6 30.8,14.8 28.739,14.8 28.65,14.711 26.4,16.961 26.4,17.686 26.539,17.825
  pour cut-out: 16.8,29.6 16.8,24.3 13.9,21.4 11.3,21.4 11.3,27.965 12.173,28.839
  pour cut-out: 30,25 29.9,24.9 29.9,19.3 26.5,19.3 25.4,20.4 25.4,24.9
  region net VCC5V: 29.7,42.6 27.1,45.2 27.1,49.6 24.9,49.6 24.9,49.2 24.9,44.2 28.1,41
  region net VCC5V: 30.2,40 28.9,38.7 28.9,37.9 26.7,35.7 26.7,32.9 25.7,32.9 25.7,36.2 28.1,38.6 28.1,41 29.7,42.6
  region net VCC5V: 1.8,38.1 7.3,38.1 8.2,37.2 11.7,37.2 11.7,39.8 8.2,39.8 7.9,39.5 1.8,39.5
  region net VCC5V: 19.5,44.2 22.3,47 25.6,47 25.6,49.6 21.2,49.6 19.8,48.2 18.1,48.2 18.1,44.2
  region net VCC5V: 41.5,39.1 40.8,39.1 37.3,42.6 29.7,42.6 29.7,40 36.4,40 38.5,37.9 41.5,37.9
  region net VCC5V: 41.5,22.1 40.2,22.1 37.2,25.1 33,25.1 33,22.5 36.9,22.5 38.5,20.9 41.5,20.9
  region net VCC5V: 36.1,8.5 36.1,14.2 36.1,17.4 33.5,17.4 33.5,14.4 34.9,13 34.9,8.5
  region net VCC5V: 19.1,8.5 19.1,11.2 22.3,14.4 22.3,17.5 19.8,17.5 19.7,17.5 19.7,13.3 17.8,11.4 17.8,8.5
  region net GND: 12.3,19.1 12.3,18.4 13,17.7 13,16.6 12.3,15.9 12.3,14.7 12.8,14.2 14.9,14.2 16.5,15.8 16.5,19.1 17.3,19.1 17.3,15.3 15.4,13.4 12.4,13.4 11.4,14.4 11.4,19.1
Bottom Layer:
  pour cut-out: 10.9,21.6 9.58,21.6 9.508,21.528 9.436,21.6 9.2,21.6 9.8,21 9.9,21.1 11.3,21.1
  pour cut-out: 13.331,26.61 13.331,24.133 10.6,21.402 10.6,21 16.1,21 15.8,21.3 15.8,24.5
  pour cut-out: 25.8,30.8 25.8,32.7 25.9,32.7 26.7,31.9
  pour cut-out: 24.315,27.121 24.194,27 22.1,27 22.1,27.6 23,28.5
  pour cut-out: 23.872,29.6 24.3,29.6 26.4,31.7 26.75,31.35 26.75,27.904 25.604,27.904 25,27.3
  pour cut-out: 26.2,25.4 27.527,24.072 27.527,23.127 28,23.6 27.246,24.354 27.246,26.631
  pour cut-out: 20.3,20.8 24,20.8 27.3,17.5 20.3,17.5
  region net VCC5V: 11.7,37.2 11.7,39.8 18.9,47 22.3,47 27.1,47 27.1,49.6 18.4,49.6 10,41.2 10,37.2
  region net VCC5V: 34.5,42.6 34.5,19.1 36.1,17.5 32.9,17.5 32.9,42.6
  region net VCC5V: 19.7,15.8 36.1,15.8 36.1,17.5 19.7,17.5

## Silkscreen, mask and mechanical layers (free items; w line width, h text height)
Mechanical 15:
  lines w0.3: 0,50 0,50.1

## Text inside footprints (layer, text, board x,y; h text height)
J1: Mechanical 1 "Edge of PCB" at 1.3,17.6 h0.4 r90
J2: Mechanical 1 "Edge of PCB" at 1.2,39.6 h0.4 r90
J3: Mechanical 1 "Edge of PCB" at 1.3,28.9 h0.4 r90
J4: Mechanical 1 "Edge of PCB" at 1.3,23 h0.4 r90
J5: Mechanical 1 "Edge of PCB" at 19.6,48.8 h0.4